# Altium PCB connector-pcb.PcbDoc
Units mm, origin at the board's own origin, x right, y up, seen from the top; angles counter-clockwise.
Board outline 35 x 25.57 mm, 2 copper layers (Top Layer, Bottom Layer); 2 components, 2 nets, 12 pads, 70 vias.
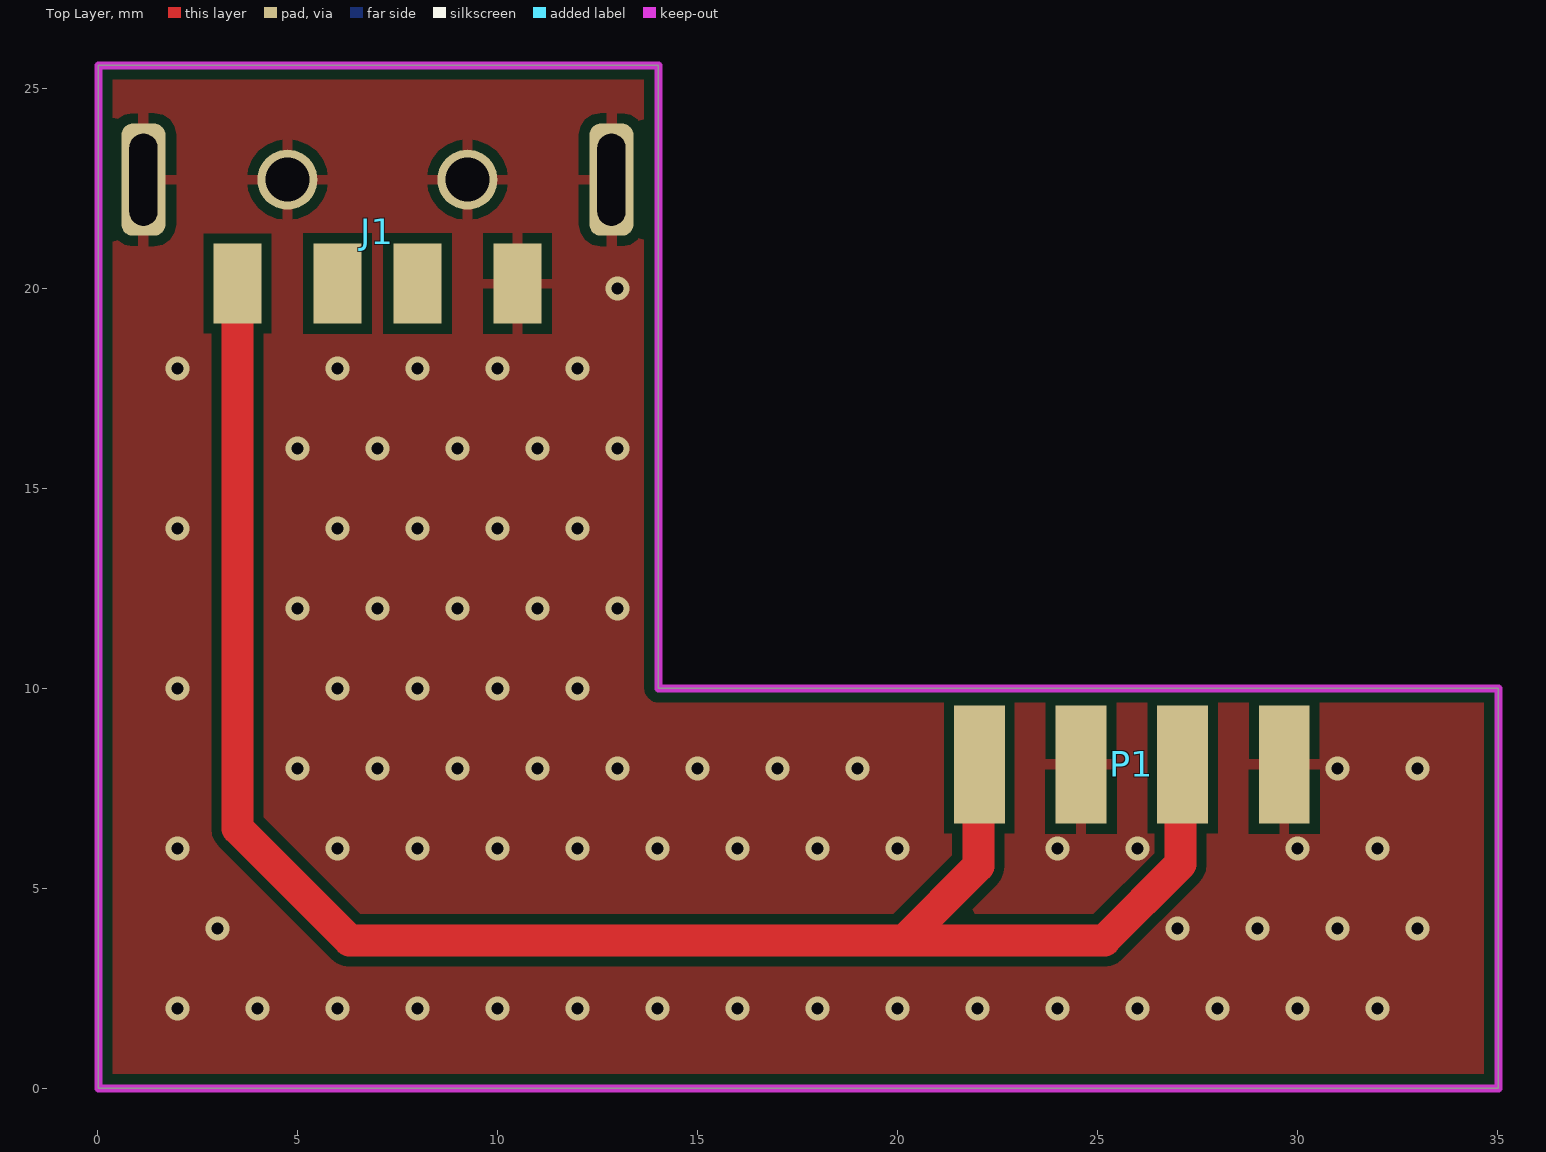
[diagram p0: Top Layer view]
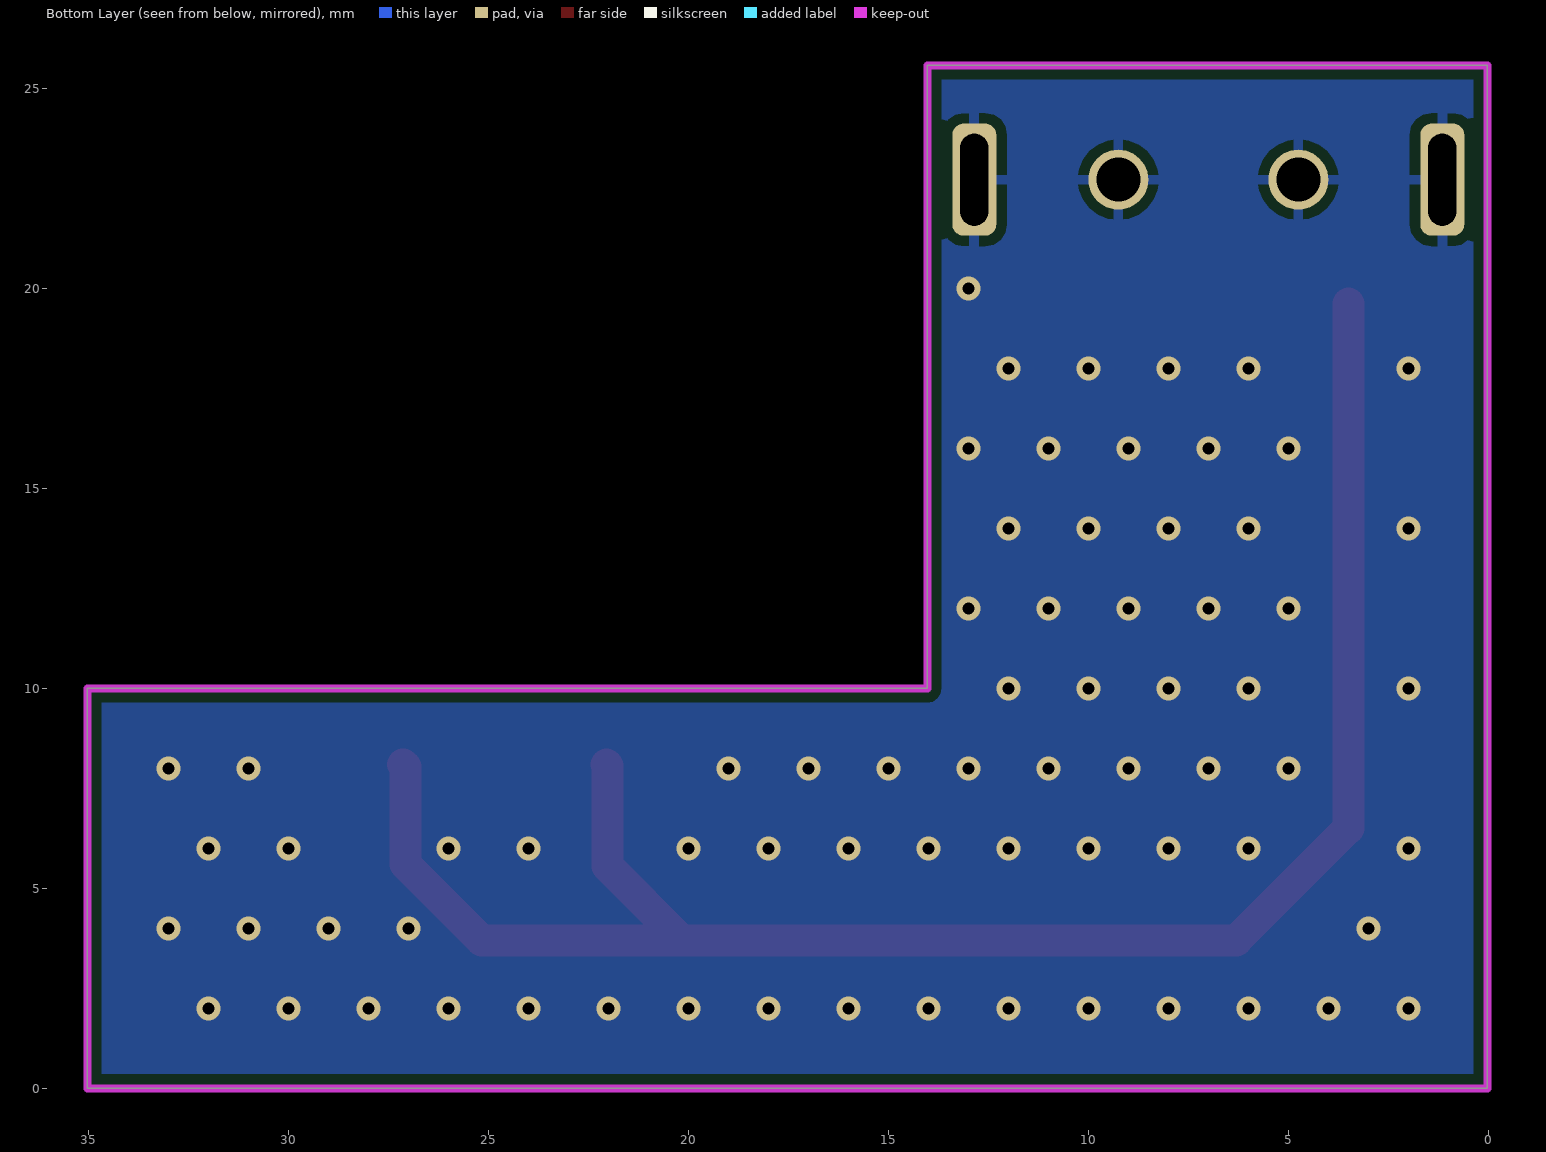
[diagram p1: Bottom Layer view, seen from below]

## Layer stack, top to bottom
Top Solder: solder mask 0.0102, Solder Resist, Dk 3.5
Top Layer: signal copper 0.0356
Dielectric 1: dielectric 0.32, FR-4, Dk 4.8
Bottom Layer: signal copper 0.0356
Bottom Solder: solder mask 0.0102, Solder Resist, Dk 3.5

## Board outline
14.021,10.008 14.021,25.578 0.021,25.578 0.021,0.008 35.021,0.008 35.021,10.008

## Design rules (kind name [scope] priority, off if disabled: settings)
Clearance [All] p1: gap=0.254 ignorepadtopadclearanceinfootprint=FALSE except(0: Arc-Hole Track-Hole SMDPad-Hole THPad-Hole Via-Hole Fill-Hole Poly-Hole Region-Hole Text-Hole)
PolygonConnect [All] p1: thpad.connectstyle=Relief thpad.reliefconductorwidth=0.254 thpad.reliefentries=4 thpad.polygonreliefangle="90 Angle" thpad.airgapwidth=0.254 smdpad.connectstyle=Relief smdpad.reliefconductorwidth=0.254 smdpad.reliefentries=4 smdpad.polygonreliefangle="90 Angle" smdpad.airgapwidth=0.254 via.connectstyle=Direct via.reliefconductorwidth=0.254 via.reliefentries=4 via.polygonreliefangle="90 Angle" via.airgapwidth=0.254
RoomDefinition connector-schematic [InComponentClass('connector-schematic')] p1 off: confinementstyle=ConfineIn formatcopy=TRUE lockcomponents=FALSE outline 36.17,1.422 54.204,1.422 54.204,25.756 36.17,25.756
RoutingVias [All] p1: holewidth=0.3 width=0.6 viastyle="Through Hole" minholewidth=0.3 minwidth=0.6 maxholewidth=8 maxwidth=8
SolderMaskExpansion [All] p1: expansion=0.102
Width [All] p1: maxlimit=8 minlimit=0.127 preferedwidth=0.254
30 further rules are at their usual default settings.

## Classes and differential pairs
component class connector-schematic: P1

## Components (designator, comment, footprint, x,y, rotation, side; value= is the part's Value field where it differs from the comment)
J1 "USB A 2.0" 0480372100 7,20.124 r180 top
P1 "header 4x1" "4x1, 2.54mm, smd side" 25.857,8.103 r180 top

## Footprints (in the part's own frame and the unit in brackets; to place one, negate y for a bottom-side part, rotate by r counter-clockwise, add the part's x,y. Pads: shape width x height; smd on the part's side, far side on the other; paste and mask are expansions set on the pad)
"4x1, 2.54mm, smd side" [mm] "molex 0878980426"
  rect 1.27x2.96 smd: 1(-3.81,0) 2(-1.27,0) 3(1.27,0) 4(3.81,0)
0480372100 [mm] "usb a 2.0 male"
  rect 1.2x2 smd: 1(3.5,0) 2(1,0) 3(-1,0) 4(-3.5,0)
  rrect50% 1.1x2.8 hole 2.3 slot 0.7 at 0 deg: SH(-5.85,-2.6) SH(5.85,-2.6)
  round 1.5 hole 1.1: SH(-2.25,-2.6) SH(2.25,-2.6)
  body extent -6,-20.42 6,0.38, height 3.05

## Part data
J1: "Type A, USB 2.0, 1 A, Vertical, Through Hole, USB Receptacle", Package=None, CUI_purchase_URL=https://www.cuidevices.com/product/interconnect/connectors/usb-connectors/uj2-av-th-series?utm_source=snapeda.com&utm_medium=referral&utm_campaign=snapedaBOM, Digi-Key_Part_Number=102-5880-ND, DigiKey-Purchase-URL=https://snapeda.com/shop?store=DigiKey&id=2779619, MF="CUI Devices", Mouser-Purchase-URL=https://snapeda.com/shop?store=Mouser&id=2779619, MP=UJ2-AV-2-TH, SnapEDA_Link=https://www.snapeda.com/parts/UJ2-AV-2-TH/CUI%20Devices/view-part/2779619/?ref=snap

## Via types
v1: diameter 0.6, hole 0.3, Top Layer to Bottom Layer, tented both sides, 70 vias

## Nets (pads, with @x,y where several pads share a name; then routed paths per layer and width w, separated by ;. In a path a pad name is that pad's centre, name@x,y a point inside that pad or via, vN(x,y) a via of type N, cw(c..) or ccw(c..) an arc to the next point about the centre after c; other vN are vias at no path point)
GND: J1.4 J1.SH P1.1 P1.3
  other v1: 2,2 4,2 6,2 8,2 10,2 12,2 14,2 16,2 18,2 20,2 22,2 24,2 26,2 28,2 30,2 32,2 3,4 27,4 29,4 31,4 33,4 2,6 6,6 8,6 10,6 12,6 14,6 16,6 18,6 20,6 24,6 26,6 30,6 32,6 5,8 7,8 9,8 11,8 13,8 15,8 17,8 19,8 31,8 33,8 2,10 6,10 8,10 10,10 12,10 5,12 7,12 9,12 11,12 13,12 2,14 6,14 8,14 10,14 12,14 5,16 7,16 9,16 11,16 13,16 2,18 6,18 8,18 10,18 12,18 13,20
NetJ1_1: J1.1 P1.2 P1.4 | length 46.3
  Top Layer w0.8: J1.1@3.5,19.624 3.5,6.508 6.299,3.708 20.168,3.708 ; P1.4 22.022,8.077 22.022,5.563 20.168,3.708 ; P1.2 27.076,8.052 27.076,5.613 25.171,3.708 20.168,3.708
pads on no net: J1.2 J1.3

## Polygon pours and split planes (outlines as drawn)
GND on Top Layer "Top Layer-GND" (solid, remove dead copper, pour order 2): 0,26.137 36.911,26.137 40.391,22.657 40.391,0 0,0
no net on Top Layer "Top Layer-No Net" (solid, pour order 0): 0.025,18.009
GND on Bottom Layer "Bottom Layer-GND" (solid, remove dead copper, pour order 4): 0,0 0,29.413 48.743,29.413 50.267,27.889 50.267,0

## Keep-outs
Keep-Out Layer:
  the board outline again, w0.2

## Silkscreen, mask and mechanical layers (free items; w line width, h text height)
Mechanical 1:
  lines w0.2: 3.976,25.474 10.066,25.474 10.091,25.449 ; 0.021,0.008 35.021,0.008 35.021,10.008 14.021,10.008 14.021,25.578 0.021,25.578 0.021,0.008